# EAGLE board PCB_CONTROLE_BOMBA (EAGLE 9.7.0)
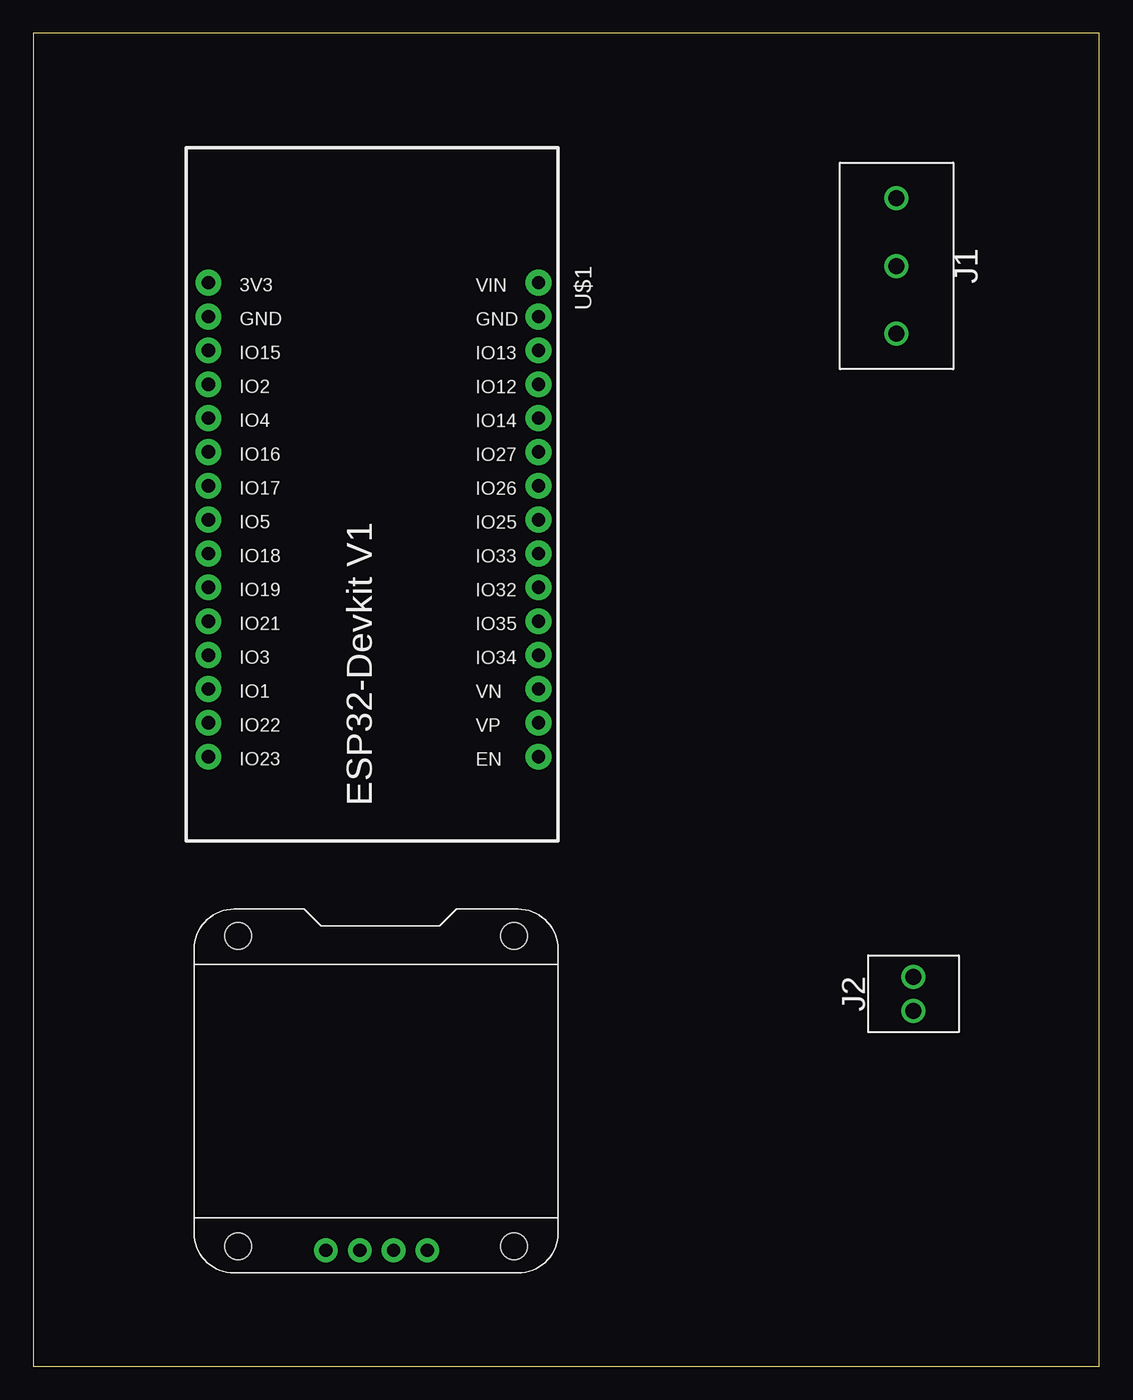
[diagram p0: board, top side]
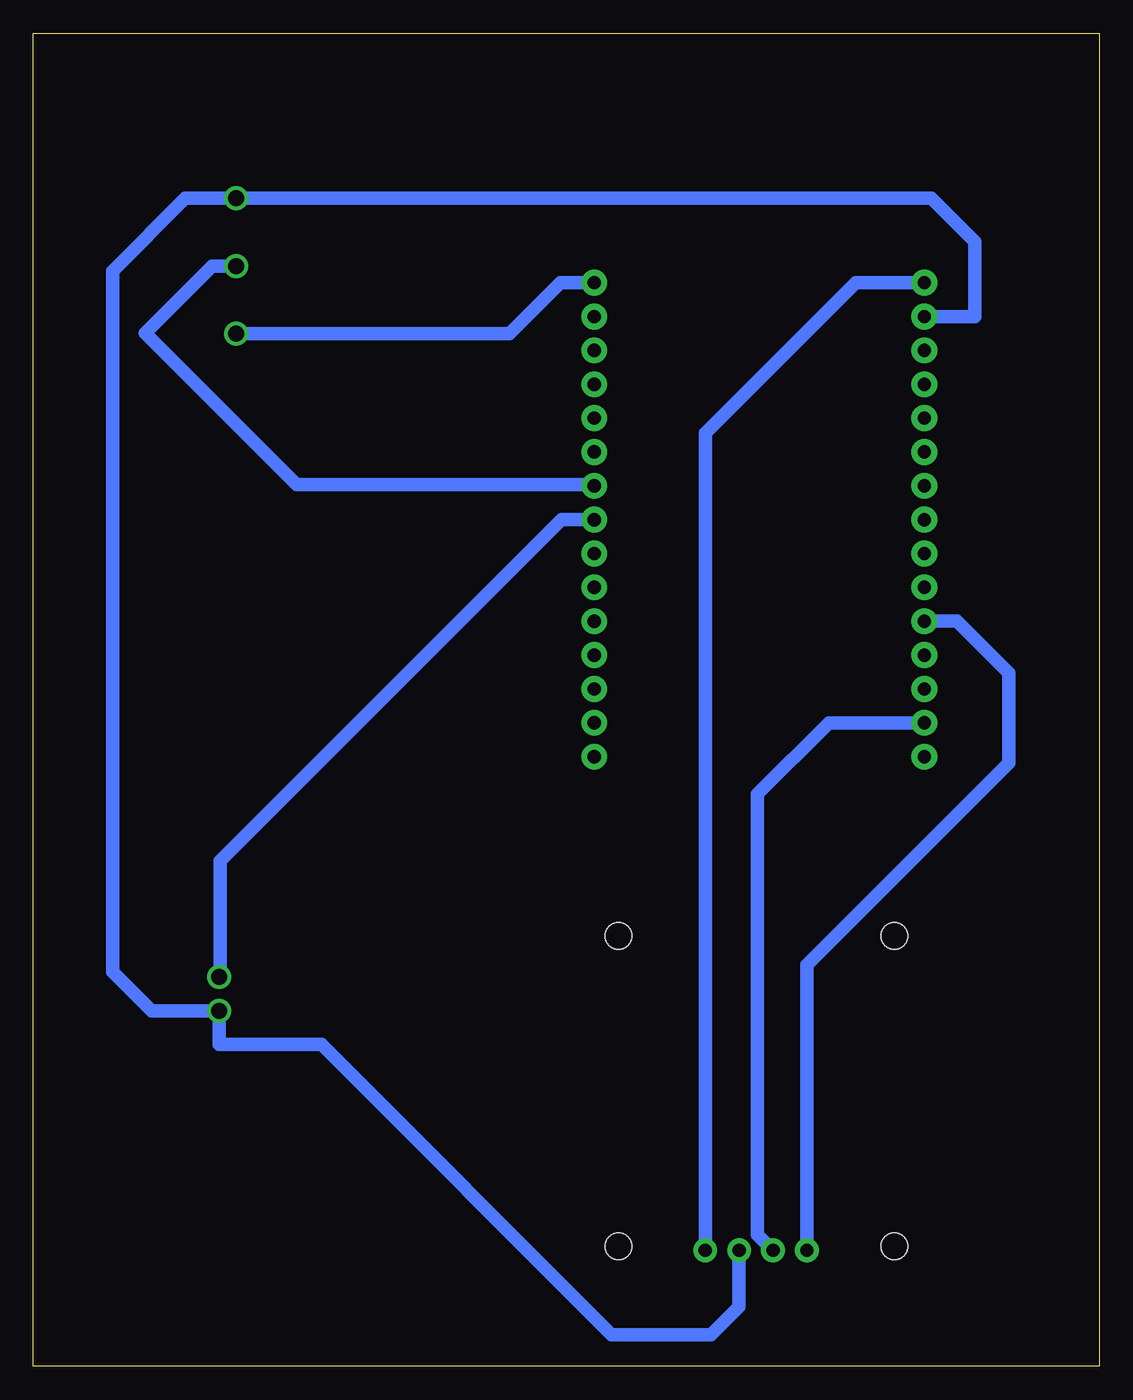
[diagram p1: board, bottom side, seen from below]

Size 79.99 x 100 mm. Coordinates in mm from the lower left corner, seen from the top.
Outline: 0,0 79.99,0 79.99,100 0,100 0,0
Copper layers (1*16): Top / Bottom
Stack-up Default Layer Stack: Top User Defined 0.035mm / Dielectric-1 User Defined 1.5mm / Bottom User Defined 0.035mm
Design rules: minimum copper width 6mil, minimum drill size 0.35mm, copper clearance wire_polygon to wire_polygon 6mil, copper clearance wire_polygon to pad_smd 6mil, copper clearance wire_polygon to via 6mil, copper clearance pad_smd to pad_smd 6mil, copper clearance pad_smd to via 6mil, copper clearance via to via 6mil, copper clearance smd to pad (same net) 6mil, copper clearance smd to via (same net) 6mil, copper clearance smd to smd (same net) 6mil, dimension clearance 40mil, restrict clearance 0mil, drill distance 6mil, keepout clearance 0mil

## Footprints (pad centres in the part's own frame; a part is rotated, then mirrored left to right if it is on the bottom)
TERMBLK_508-3N = drill 1.2: 1 0,0; 2 5.08,0; 3 10.16,0
TERMBLK_254-2N = drill 1.2: 1 0,0; 2 2.54,0
ESP32-DEVKITV1 = drill 1 pad 1.93: 1 -22.87,-13.54; 2 -20.33,-13.54; 3 -17.79,-13.54; 4 -15.25,-13.54; 5 -12.71,-13.54; 6 -10.17,-13.54; 7 -7.63,-13.54; 8 -5.09,-13.54; 9 -2.55,-13.54; 10 -0.01,-13.54; 11 2.53,-13.54; 12 5.07,-13.54; 13 7.61,-13.54; 14 10.15,-13.54; 15 12.69,-13.54; 16 12.69,11.23; 17 10.15,11.23; 18 7.61,11.23; 19 5.07,11.23; 20 2.53,11.23; 21 -0.01,11.23; 22 -2.55,11.23; 23 -5.09,11.23; 24 -7.63,11.23; 25 -10.17,11.23; 26 -12.71,11.23; 27 -15.25,11.23; 28 -17.79,11.23; 29 -20.33,11.23; 30 -22.87,11.23
OLED_0.96_I2C = drill 1 pad 1.778: GND -1.63,11.63; SCL 0.91,11.63; SDA 3.45,11.63; VCC -4.17,11.63 | hole 2: -10.67,-11.97; 10.03,-11.97; 10.03,11.33; -10.67,11.33

## Placement (x,y rotation side)
J1  2828XX-3282837-3  [TERMBLK_508-3N]  64.77,77.47 90 top
J2  2828XX-2282834-2  [TERMBLK_254-2N]  66.04,29.21 270 top
U$1  ESP32DEVKITV1  [ESP32-DEVKITV1]  26.67,58.42 270 top
U$2  OLED_0.96_I2C  [OLED_0.96_I2C]  25.4,20.32 180 top

## Library data of the parts
J1 = Connector; CATEGORY: Connector; DESCRIPTION: TERM BLK 3P SIDE ENT 5.08mm PCB; MANUFACTURER: TE Connectivity; MPN: 282837-3; OPERATING_TEMPERATURE: -40°C to +105°C; PART_STATUS: Active; PITCH: 0.200" (5.08mm); ROHS_COMPLIANCE: RoHS Compliant; SERIES: Buchanan; SUBCATEGORY: Terminal Block; TYPE: Side Wire Entry
J2 = Connector; CATEGORY: Fixed Terminal Blocks; DESCRIPTION: Fixed Terminal Blocks 2P SIDE ENTRY 2.54mm; MANUFACTURER: TE Connectivity AMP Connectors; MPN: 282834-2; OPERATING_TEMPERATURE: -40°C ~ 105°C; PART_STATUS: Active; PITCH: 0.100" (2.54mm); ROHS_COMPLIANCE: RoHS Compliant; SERIES: Buchanan; SUBCATEGORY: Terminal Blocks; TYPE: Through Hole; Screw - Rising Cage Clamp; Side wire entry, Horizontal with Board
U$1 = ESP32-DEVKITV1
U$2 = tft_1_8_1_44_oled_0_96

## Nets
N$1: U$1.1 U$2.VCC
N$2: J1.3 J2.2 U$1.2 U$2.GND
N$3: U$1.11 U$2.SDA
N$4: U$1.14 U$2.SCL
N$5: J1.1 U$1.30
N$6: J1.2 U$1.24
N$7: J2.1 U$1.23

## Tracks (layer width: path | path; a pad name or v marks a point on that pad's centre or on a via)
N$1
  Bottom 0.152: 29.57,8.84 U$2.VCC
  Bottom 1: 29.57,8.84 29.57,70 18.28,81.29 U$1.1
N$2
  Bottom 1: U$2.GND 27.03,4.47 29.13,2.36 36.6,2.36 58.37,24.13 66.04,24.13 J2.2 71.12,26.67 74.04,29.59 74.04,82.17 68.58,87.63 J1.3 12.6,87.63 9.35,84.38 9.35,78.75 U$1.2
N$3
  Bottom 0.152: 21.95,8.84 U$2.SDA
  Bottom 1: 21.95,8.84 21.95,30.12 6.81,45.26 6.81,52.02 10.68,55.89 U$1.11
N$4
  Bottom 1: U$2.SCL 25.65,9.85 25.65,42.93 20.31,48.27 U$1.14
N$5
  Bottom 1: J1.1 44.25,77.47 40.43,81.29 U$1.30
N$6
  Bottom 0.152: U$1.24 37.95,66.14
  Bottom 1: 37.95,66.14 60.25,66.14 71.61,77.51 66.57,82.55 J1.2
N$7
  Bottom 0.152: 65.99,29.26 J2.1
  Bottom 1: 65.99,29.26 65.99,37.9 40.38,63.51 U$1.23